# Altium PCB SHIELD_TRF7960A.PcbDoc
Units mil, origin at the board's own origin, x right, y up, seen from the top; angles counter-clockwise.
Board outline 3895 x 2300 mil, 2 copper layers (Top Layer, Bottom Layer); 71 components, 58 nets, 201 pads, 46 vias.
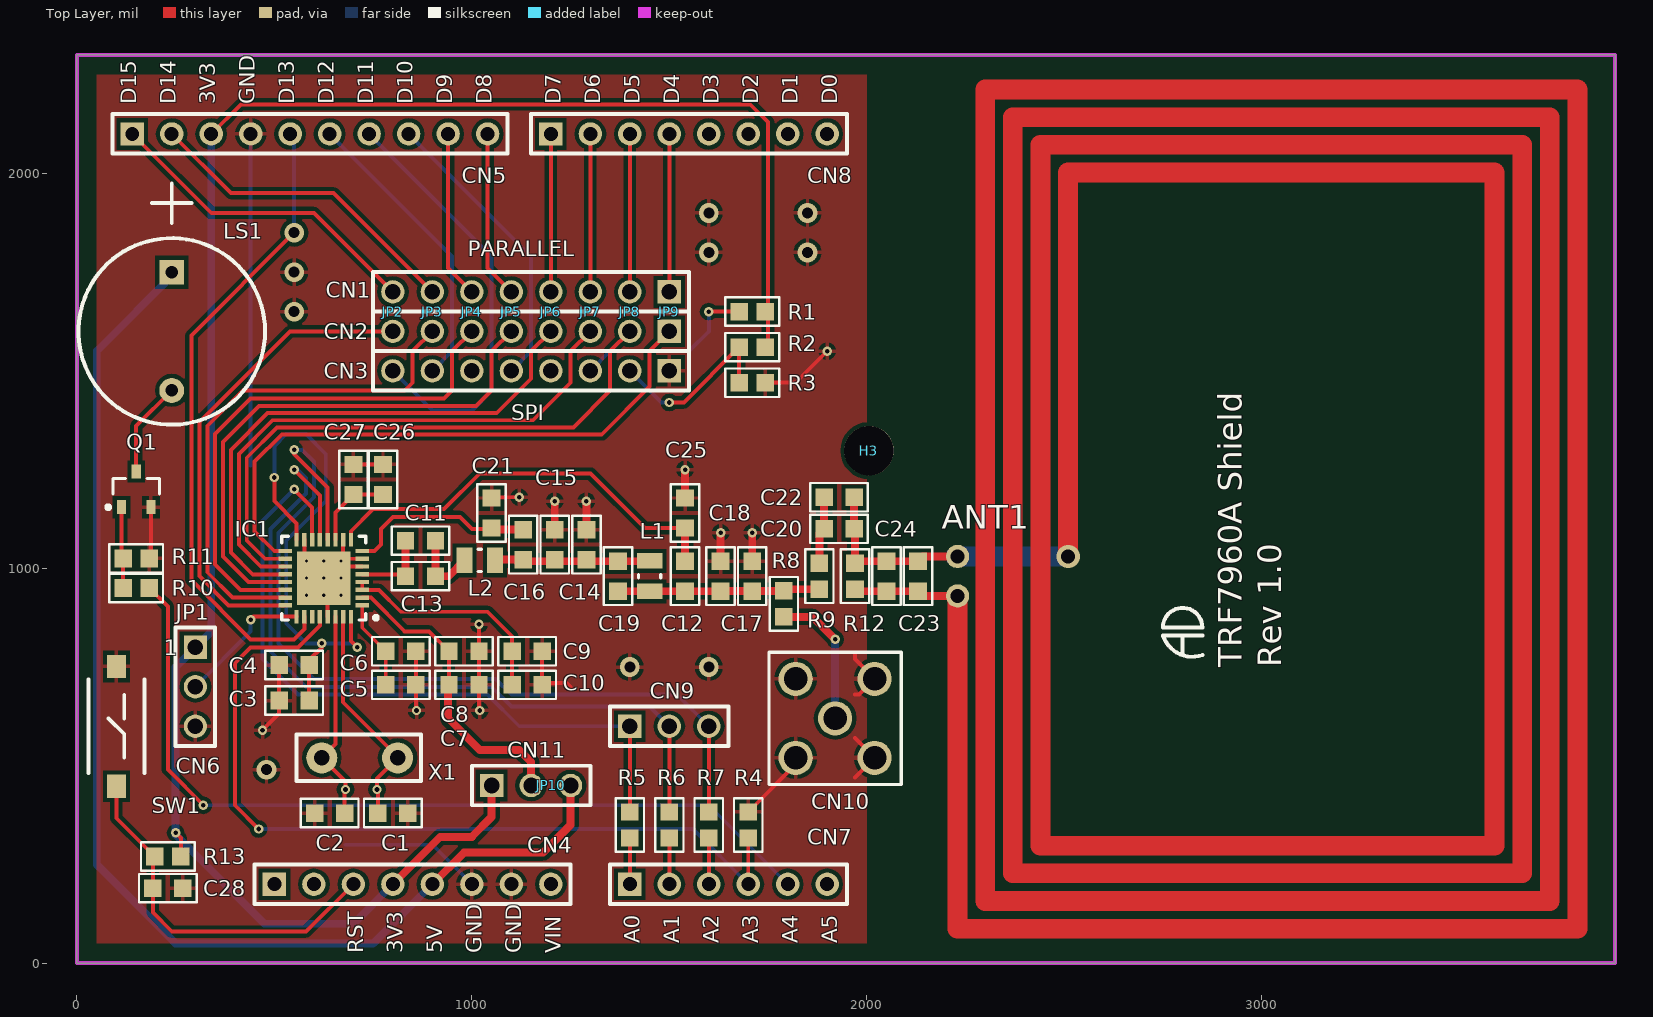
[diagram p0: Top Layer view]
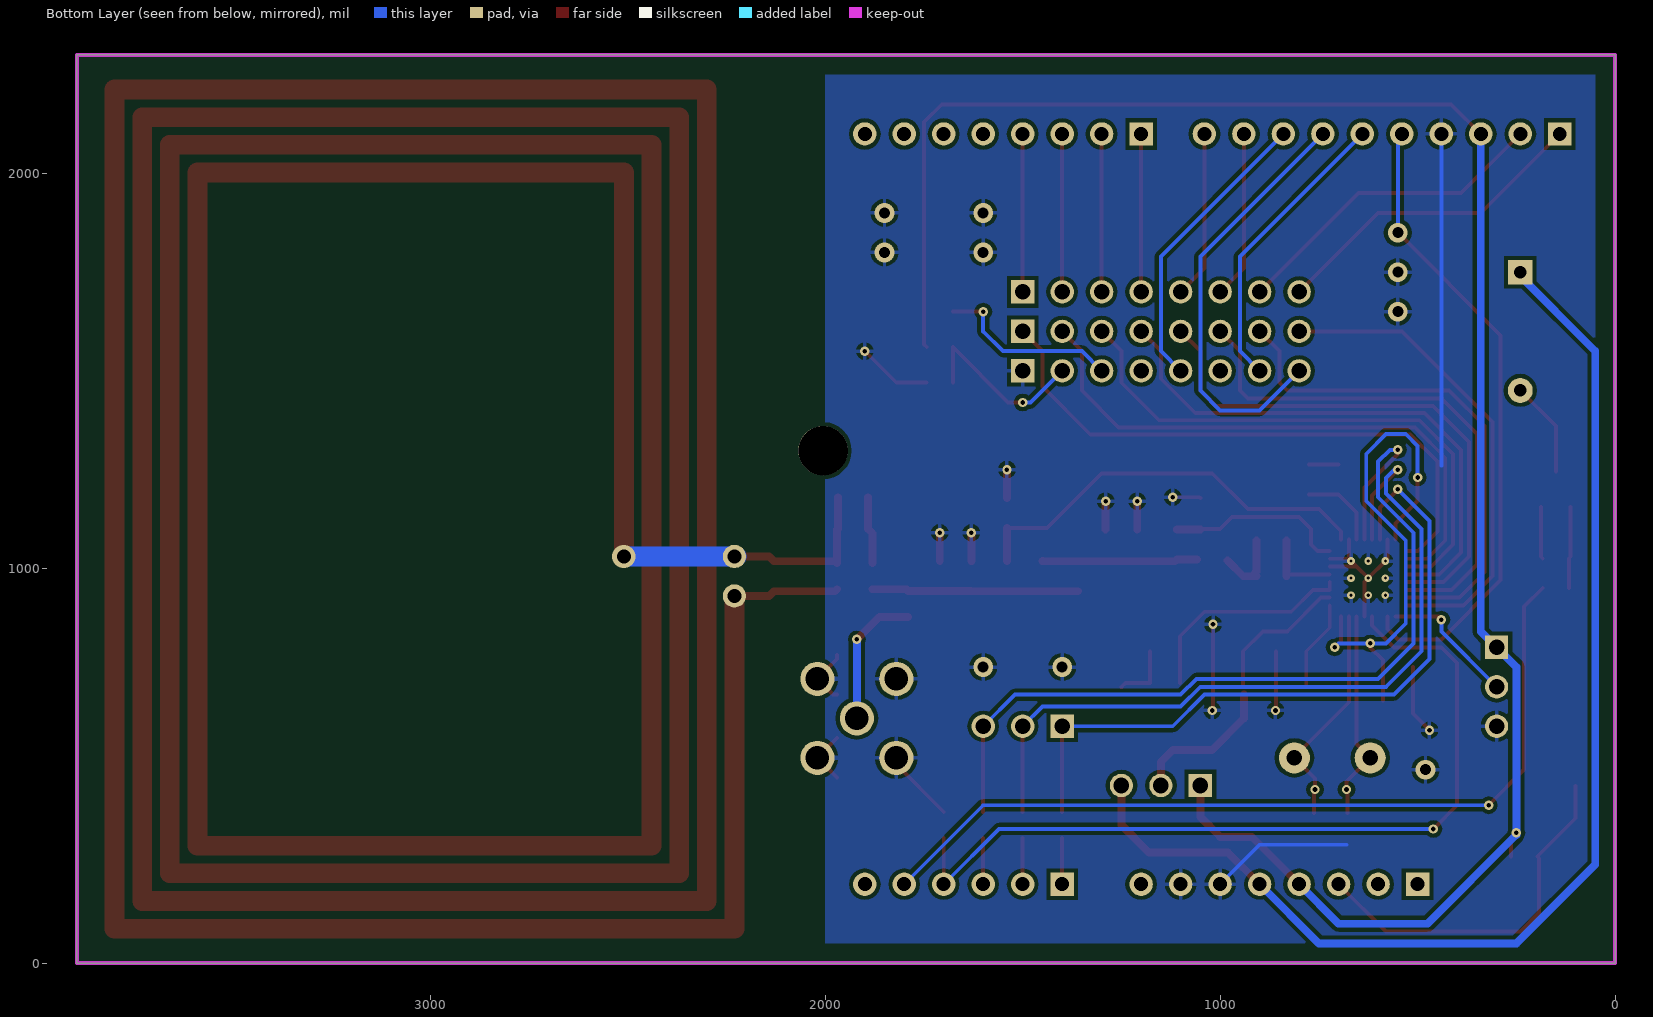
[diagram p1: Bottom Layer view, seen from below]

## Layer stack, top to bottom
Top Solder: solder mask 0.4, Solder Resist, Dk 3.5
Top Layer: signal copper 1.4
Dielectric 1: dielectric 12.6, FR-4, Dk 4.8
Bottom Layer: signal copper 1.4
Bottom Solder: solder mask 0.4, Solder Resist, Dk 3.5

## Board outline
0,0 0,2300 3895,2300 3895,0

## Design rules (kind name [scope] priority, off if disabled: settings)
Clearance [All] p1: gap=6 except(10: Arc-Fill Arc-Poly Track-Fill Track-Poly SMDPad-Fill SMDPad-Poly THPad-Fill THPad-Poly Via-Fill Via-Poly Fill-Fill Fill-Poly Poly-Poly)
HoleSize [All] p1: absolutevalues=TRUE maxlimit=500 minlimit=1 maxpercent=80.000 minpercent=20.000
MinimumSolderMaskSliver [All] p1: minsoldermaskwidth=6
PolygonConnect [All] p1: connectstyle=Relief reliefconductorwidth=10 reliefentries=4 polygonreliefangle="90 Angle" airgapwidth=10
RoutingVias [All] p1: holewidth=11.81 width=23.62 viastyle="Through Hole" minholewidth=11.81 minwidth=23.62 maxholewidth=11.81 maxwidth=23.62
SilkToSilkClearance [All] p1: silktosilkclearance=6
SilkToSolderMaskClearance [IsPad] p1: minsilkscreentomaskgap=6 clearancetoexposedcopper=TRUE
SolderMaskExpansion [All] p1: expansion=4
Width [All] p1: maxlimit=50 minlimit=10 preferedwidth=20 minimp=50.000000 maximp=50.000000 favimp=50.000000
26 further rules are at their usual default settings.

## Components (designator, comment, footprint, x,y, rotation, side; value= is the part's Value field where it differs from the comment)
ANT1 "ANTENNA_LOOP" ANTENNA_LOOP 2230,930 r90 top
C1 "CAP_NP" CAPC1608X90N_EIA0603 800,380 r0 top
C2 "CAP_NP" CAPC1608X90N_EIA0603 640,380 r180 top
C3 "CAP_NP" CAPC1608X90N_EIA0603 550,665 r0 top
C4 "CAP_NP" CAPC1608X90N_EIA0603 550,755 r0 top
C5 "CAP_NP" CAPC1608X90N_EIA0603 820,705 r180 top
C6 "CAP_NP" CAPC1608X90N_EIA0603 820,790 r180 top
C7 "CAP_NP" CAPC1608X90N_EIA0603 980,705 r180 top
C8 "CAP_NP" CAPC1608X90N_EIA0603 980,790 r180 top
C9 "CAP_NP" CAPC1608X90N_EIA0603 1140,705 r180 top
C10 "CAP_NP" CAPC1608X90N_EIA0603 1140,790 r180 top
C11 "CAP_NP" CAPC1608X90N_EIA0603 870,1070 r0 top
C12 "CAP_NP" CAPC1608X90N_EIA0603 1540,980 r270 top
C13 "CAP_NP" CAPC1608X90N_EIA0603 870,980 r0 top
C14 "CAP_NP" CAPC1608X90N_EIA0603 1290,1060 r270 top
C15 "CAP_NP" CAPC1608X90N_EIA0603 1210,1060 r270 top
C16 "CAP_NP" CAPC1608X90N_EIA0603 1130,1060 r270 top
C17 "CAP_NP" CAPC1608X90N_EIA0603 1710,980 r270 top
C18 "CAP_NP" CAPC1608X90N_EIA0603 1630,980 r270 top
C19 "CAP_NP" CAPC1608X90N_EIA0603 1370,980 r270 top
C20 "CAP_NP" CAPC1608X90N_EIA0603 1930,1100 r0 top
C21 "CAP_NP" CAPC1608X90N_EIA0603 1050,1140 r270 top
C22 "CAP_NP" CAPC1608X90N_EIA0603 1930,1180 r0 top
C23 "CAP_NP" CAPC1608X90N_EIA0603 2130,980 r270 top
C24 "CAP_NP" CAPC1608X90N_EIA0603 2050,980 r270 top
C25 "CAP_NP" CAPC1608X90N_EIA0603 1540,1140 r270 top
C26 "CAP_NP" CAPC1608X90N_EIA0603 775,1225 r270 top
C27 "CAP_NP" CAPC1608X90N_EIA0603 700,1225 r270 top
C28 "CAP_NP" CAPC1608X90N_EIA0603 230,190 r180 top
CN1 "HDRV_1X8" HDRV8W64P254_1X8_2032X254X600P 1500,1700 r180 top
CN2 "HDRV_1X8" HDRV8W64P254_1X8_2032X254X600P 1500,1600 r180 top
CN3 "HDRV_1X8" HDRV8W64P254_1X8_2032X254X600P 1500,1500 r180 top
CN4 "HDR_1X8" HDRFV8W70P254_1X8_2032X254X1118P 500,200 r0 top locked
CN5 "HDR_1X10" HDRFV10W70P254_1X10_2540X254X1118P 140,2100 r0 top locked
CN6 "HDR_1X3" HDRV3W64P254_1X3_762X254X600P 300,800 r270 top
CN7 "HDR_1X6" HDRFV6W70P254_1X6_1524X254X1118P 1400,200 r0 top locked
CN8 "HDR_1X8" HDRFV8W70P254_1X8_2032X254X1118P 1200,2100 r0 top locked
CN9 "HDR_1X3" HDRV3W64P254_1X3_762X254X600P 1400,600 r0 top
CN10 "SMA" EMERSON_142-0701-201 1920,620 r0 top
CN11 "HDR_1X3" HDRV3W64P254_1X3_762X254X600P 1050,450 r0 top
H3 "HOLES" HOLE_125MIL 2005.51,1298.03 r0 top
IC1 "TRF7960A" QFN50P350X500X90_HS-33N 625,975 r180 top
JP1 "JUMPER" JUMPER254P 300,750 r90 top
JP2 "JUMPER" JUMPER254P 800,1650 r90 top
JP3 "JUMPER" JUMPER254P 900,1650 r90 top
JP4 "JUMPER" JUMPER254P 1000,1650 r90 top
JP5 "JUMPER" JUMPER254P 1100,1650 r90 top
JP6 "JUMPER" JUMPER254P 1200,1650 r90 top
JP7 "JUMPER" JUMPER254P 1300,1650 r90 top
JP8 "JUMPER" JUMPER254P 1400,1650 r90 top
JP9 "JUMPER" JUMPER254P 1500,1650 r90 top
JP10 "JUMPER" JUMPER254P 1200,450 r180 top
L1 "INDUCTOR" INDC2115X13N_EIA0805 1450,980 r90 top
L2 "INDUCTOR" INDC2115X13N_EIA0805 1020,1020 r180 top
LS1 "BUZZER" BUZZER_12MM 240,1600 r270 top
Q1 "BC817" SOT95P230X110-3N_SOT-23 150,1200 r90 top
R1 "RES" RESC1608X50N_EIA0603 1710,1650 r180 top
R2 "RES" RESC1608X50N_EIA0603 1710,1560 r180 top
R3 "RES" RESC1608X50N_EIA0603 1710,1470 r0 top
R4 "RES" RESC1608X50N_EIA0603 1700,350 r270 top
R5 "RES" RESC1608X50N_EIA0603 1400,350 r90 top
R6 "RES" RESC1608X50N_EIA0603 1500,350 r90 top
R7 "RES" RESC1608X50N_EIA0603 1600,350 r90 top
R8 "RES" RESC1608X50N_EIA0603 1790,910 r270 top (schematic designator R?)
R9 "RES" RESC1608X50N_EIA0603 1880,980 r90 top (schematic designator R?)
R10 "RES" RESC1608X50N_EIA0603 150,950 r180 top
R11 "RES" RESC1608X50N_EIA0603 150,1025 r0 top
R12 "RES" RESC1608X50N_EIA0603 1970,980 r270 top
R13 "RES" RESC1608X50N_EIA0603 230,270 r180 top
SW1 "SWITCH_TACTILE_2PIN" C&K_RS-282G05A3-SM_RT 100,600 r90 top
X1 "CRYSTAL" HC-49/US 812.13,520 r180 top

## Footprints (in the part's own frame and the unit in brackets; to place one, negate y for a bottom-side part, rotate by r counter-clockwise, add the part's x,y. Pads: shape width x height; smd on the part's side, far side on the other; paste and mask are expansions set on the pad)
ANTENNA_LOOP [mm]
  round 1.5 hole 0.9: 1(0,0) 2(2.54,0)
BUZZER_12MM [mm]
  rect 1.6x1.6 hole 0.8: 1(-3.8,0)
  round 1.6 hole 0.8: 2(3.8,0)
  silkscreen extent -9.53,-6 6,6, body extent -6,-6 6,6, height 9.01
C&K_RS-282G05A3-SM_RT [mm]
  rect 1.5x1.2 smd: 1(-3.85,0) 2(3.85,0)
  silkscreen extent -3,-1.8 3,1.8, body extent -4,-1.75 4,1.75, height 5
CAPC1608X90N_EIA0603 [mil]
  rect 44x45 smd: 1(-38,0) 2(38,0)
  silkscreen extent -73,-36 73,36, body extent -39,-15 39,16, height 31
EMERSON_142-0701-201 [mm]
  round 2.2 hole 1.5 mask+0.075: 1(0,0) 2(-2.54,2.54) 3(2.54,2.54) 4(2.54,-2.54) 5(-2.54,-2.54)
  silkscreen extent -4.25,-4.25 4.25,4.25, body extent -3.18,-3.15 3.13,3.16, height 9.85
HC-49/US [mm]
  round 2 hole 1: 1(0,0) 2(4.88,0)
  silkscreen extent -1.5,-1.5 6.5,1.5, body extent -2.99,-2.24 7.99,2.25, height 3.6
HDRFV6W70P254_1X6_1524X254X1118P [mm]
  rect 1.5x1.5 hole 0.9: 1(0,0)
  round 1.5 hole 0.9: 2(2.54,0) 3(5.08,0) 4(7.62,0) 5(10.16,0) 6(12.7,0)
  silkscreen extent -1.27,-1.27 13.97,1.27, body extent -1.27,-1.27 13.97,1.27, height 6.02
HDRFV8W70P254_1X8_2032X254X1118P [mm]
  rect 1.5x1.5 hole 0.9: 1(0,0)
  round 1.5 hole 0.9: 2(2.54,0) 3(5.08,0) 4(7.62,0) 5(10.16,0) 6(12.7,0) 7(15.24,0) 8(17.78,0)
  silkscreen extent -1.27,-1.27 19.05,1.27, body extent -1.27,-1.27 19.05,1.27, height 6.02
HDRFV10W70P254_1X10_2540X254X1118P [mm]
  rect 1.5x1.5 hole 0.9: 1(0,0)
  round 1.5 hole 0.9: 2(2.54,0) 3(5.08,0) 4(7.62,0) 5(10.16,0) 6(12.7,0) 7(15.24,0) 8(17.78,0) 9(20.32,0) 10(22.86,0)
  silkscreen extent -1.27,-1.27 24.13,1.27, body extent -1.27,-1.27 24.13,1.27, height 6.02
HDRV3W64P254_1X3_762X254X600P [mm]
  rect 1.5x1.5 hole 1: 1(0,0)
  round 1.5 hole 1: 2(2.54,0) 3(5.08,0)
  silkscreen extent -1.27,-1.27 6.35,1.27, body extent -1.24,-1.27 6.38,1.27, height 5.94
HDRV8W64P254_1X8_2032X254X600P [mm]
  rect 1.5x1.5 hole 1: 1(0,0)
  round 1.5 hole 1: 2(2.54,0) 3(5.08,0) 4(7.62,0) 5(10.16,0) 6(12.7,0) 7(15.24,0) 8(17.78,0)
  silkscreen extent -1.27,-1.27 19.05,1.27, body extent -1.27,-1.27 19.05,1.27, height 5.94
HOLE_125MIL [mil]
  round 125 hole 125: 1(0,0)
INDC2115X13N_EIA0805 [mm] "Chip Inductor, 2-Leads, Body 2.10x1.50mm, IPC Medium Density"
  rect 1x1.64 smd: 1(-0.98,0) 2(0.98,0)
  silkscreen extent -0.1,-0.72 0.1,0.72, body extent -1,-0.66 1,0.64, height 1.21
JUMPER254P [mil]
  body extent -68,-48 68,48, height 277
QFN50P350X500X90_HS-33N [mm] "QFN, 32-Leads, Body 3.50x5.00mm, Pitch 0.50mm, Thermal Pad 3.45x3.45mm, IPC Medium Density"
  rect 0.85x0.28 smd: 1(-2.475,1.75) 2(-2.475,1.25) 3(-2.475,0.75) 4(-2.475,0.25) 5(-2.475,-0.25) 6(-2.475,-0.75) 7(-2.475,-1.25) 8(-2.475,-1.75) 17(2.475,-1.75) 18(2.475,-1.25) 19(2.475,-0.75) 20(2.475,-0.25) 21(2.475,0.25) 22(2.475,0.75) 23(2.475,1.25) 24(2.475,1.75)
  rect 0.28x0.85 smd: 9(-1.75,-2.475) 10(-1.25,-2.475) 11(-0.75,-2.475) 12(-0.25,-2.475) 13(0.25,-2.475) 14(0.75,-2.475) 15(1.25,-2.475) 16(1.75,-2.475) 25(1.75,2.475) 26(1.25,2.475) 27(0.75,2.475) 28(0.25,2.475) 29(-0.25,2.475) 30(-0.75,2.475) 31(-1.25,2.475) 32(-1.75,2.475)
  rect 3.45x3.45 smd: 33(0,0)
  silkscreen extent -3.47,-2.7 2.7,2.7, body extent -2.52,-2.51 2.5,2.51, height 0.8
RESC1608X50N_EIA0603 [mil]
  rect 44x45 smd: 1(-33,0) 2(33,0)
  silkscreen extent -68,-36 68,36, body extent -39,-15 39,16, height 31
SOT95P230X110-3N_SOT-23 [mm] "SOT23, 3-Leads, Body 2.90x2.30mm, Pitch 0.95mm, IPC Medium Density"
  rect 0.9x0.6 smd: 1(-1.15,0.95) 2(-1.15,-0.95) 3(1.15,0)
  silkscreen extent -1.27,-1.5 0.7,1.92, body extent -1.17,-1.46 1.17,1.46, height 1

## Part data
ANT1: library part SMSC00004, "ANTENNA LOOP"
C1 C2: library part SCAP00200035, "CAP CER 12PF 50V NP0 0603"
C3 C5 C7 C9 C26: library part SCAP00200098, "CAP CER 2.2UF 6.3V X5R 0603"
C4 C6 C8 C10 C27: library part SCAP00200083, "CAP CER 10000PF 50V X7R 0603"
C11 C13: library part SCAP00200075, "CAP CER 1500PF 50V X7R 0603"
C12: library part SCAP00200065, "CAP CER 220PF 50V NP0 0603"
C14 C24: library part SCAP00200000
C15 C25: library part SCAP00200071, "CAP CER 680PF 50V NP0 0603"
C16 C21: library part SCAP00200074, "CAP CER 1200PF 50V X7R 0603"
C17: library part SCAP00200043, "CAP CER 27PF 50V NP0 0603"
C18: library part SCAP00200057, "CAP CER 100PF 50V NP0 0603"
C19 C22: library part SCAP00200033, "CAP CER 10PF 50V NP0 0603"
C20: library part SCAP00200049, "CAP CER 47PF 50V NP0 0603"
C23: library part SCAP00200051, "CAP CER 56PF 50V NP0 0603"
C28: library part SCAP00200091, "CAP CER 0.1UF 16V X7R 0603"
CN1 CN2 CN3: library part SCON00132, "CONN HEADER 8POS .100 VERT TIN"
CN4 CN8: library part SCON00125, "CONN ARDUINO HEADER .0100\" 8POS"
CN5: library part SCON00126, "CONN ARDUINO HEADER .0100\" 10POS"
CN6 CN9 CN11: library part SCON00131, "CONN HEADER MALE 3PS .1\" DL TIN"
CN7: library part SCON00124, "CONN ARDUINO HEADER .0100\" 6POS"
CN10: library part SCON00009, "CONN SMA JACK STR 50 OHM PCB"
H3: library part SMSC00005, "Holes"
IC1: library part SIC00130, "IC RFID AFE 13.56MHZ 32QFN"
JP1 JP2 JP3 JP4 JP5 JP6 JP7 JP8 JP9 JP10: library part SCON00007, "SHUNT JUMPER .1\" BLACK GOLD"
L1: library part SIND00005, "FIXED IND 330NH 300MA 1.28 OHM"
L2: library part SIND00004, "FIXED IND 150NH 400MA 670 MOHM"
LS1: library part SAUD00001, "AUDIO MAGNETIC INDICATOR 4-7V TH"
Q1: library part STRANS00034, "TRANS NPN 45V 0.5A SOT23"
R1 R2 R4 R10 R13: library part SRES02000098, "RES SMD 10K OHM 1% 1/10W 0603"
R3 R8 R9: library part SRES02030001, "RES SMD 0.0 OHM JUMPER 1/8W 0603"
R5 R6 R7 R12: library part SRES02000074, "RES SMD 1K OHM 1% 1/10W 0603"
R11: library part SRES02000114, "RES SMD 47K OHM 1% 1/10W 0603"
SW1: library part SSWI00022, "SWITCH TACTILE SPST-NO 0.05A 12V"
X1: library part SCRY00014, "CRYSTAL 13.5600MHZ 12PF T/H"

## Via types
v1: diameter 23.62, hole 11.81, Top Layer to Bottom Layer, 26 vias
v2: diameter 50, hole 28, Top Layer to Bottom Layer, 10 vias
v3: diameter 19.68, hole 7.87, Top Layer to Bottom Layer, 9 vias
v4: diameter 59.06, hole 35.43, Top Layer to Bottom Layer, 1 vias

## Nets (pads, with @x,y where several pads share a name; then routed paths per layer and width w, separated by ;. In a path a pad name is that pad's centre, name@x,y a point inside that pad or via, vN(x,y) a via of type N, cw(c..) or ccw(c..) an arc to the next point about the centre after c; other vN are vias at no path point)
3V3: CN4.4 CN5.3 CN6.1 CN11.1 R1.1 R2.1 R13.1 | length 4995.3
  Top Layer w10: v1(250,330) 263,317 R13.1 ; CN5.3 415,2175 1705,2175 1750,2130 1750,1567 R2.1
  Top Layer w20: CN4.4 920,320 1000,320 1050,370 CN11.1
  Bottom Layer w20: CN5.3 340,840 250,750 v1(250,330) 250,325 475,100 700,100 CN4.4
5V: CN4.5 CN11.3 LS1.1 | length 3089.7
  Top Layer w20: CN4.5 980,280 1180,280 1250,350 CN11.3
  Bottom Layer w20: LS1.1@249.8,1749.8 50,1550 50,250 250,50 750,50 CN4.5
A0: CN7.1 R5.1 | length 117
  Top Layer w10: CN7.1 R5.1
A1: CN7.2 R6.1 | length 117
  Top Layer w10: CN7.2 R6.1
A2: CN7.3 R7.1 | length 117
  Top Layer w10: CN7.3 R7.1
A3: CN7.4 IC1.28 R4.2 | length 2136.8
  Top Layer w10: v1(460,340) 400,400 400,760 440,800 560,800 615.16,855.16 IC1.28 ; CN7.4 R4.2
  Bottom Layer w10: v1(460,340) 1560,340 CN7.4
A4: CN7.5 R10.1 | length 2169.6
  Top Layer w10: R10.1 230,903 230,490 v1(320,400)
  Bottom Layer w10: v1(320,400) 1600,400 CN7.5
A5: CN7.6
ANT-1: ANT1.1 ANT1.2 C20.2 C22.2 C23.1 C23.2 C24.1 C24.2 R12.1 R12.2 | length 26806.9
  Top Layer w20: C22.2 C20.2 1970,1098 R12.1 1975,1018 C24.1 C23.1 2142,1030 ANT1.2 ; R12.2 1975,942 C24.2 C23.2 2142,930 ANT1.1
  Top Layer w50: ANT1.1 2230,87.5 3800,87.5 3800,2212.5 2300,2212.5 2300,157.5 3730,157.5 3730,2142.5 2370,2142.5 2370,227.5 3660,227.5 3660,2072.5 2440,2072.5 2440,297.5 3590,297.5 3590,2002.5 2510,2002.5 v4(2510,1030)
  Bottom Layer w50: ANT1.2@2225,1030 ANT1.2 v4(2510,1030)
D0: CN8.8
D1: CN8.7
D2: CN8.6
D3: CN8.5
D4: CN1.1 CN8.4 | length 400
  Top Layer w10: CN1.1 CN8.4
D5: CN1.2 CN8.3 | length 400
  Top Layer w10: CN1.2 CN8.3
D6: CN1.3 CN8.2 | length 400
  Top Layer w10: CN1.3 CN8.2
D7: CN1.4 CN8.1 | length 400
  Top Layer w10: CN1.4 CN8.1
D8: CN1.5 CN5.10 | length 424.9
  Top Layer w10: CN5.10 1040,1760 CN1.5
D9: CN1.6 CN5.9 | length 424.9
  Top Layer w10: CN5.9 940,1760 CN1.6
D10: CN3.5 CN5.8 | length 749.1
  Bottom Layer w10: CN5.8 1150,1790 1150,1550 CN3.5
D11: CN3.8 CN5.7 | length 1090.5
  Bottom Layer w10: CN5.7 1050,1790 1050,1450 1000,1400 900,1400 CN3.8
D12: CN3.7 CN5.6 | length 749.1
  Bottom Layer w10: CN5.6 950,1790 950,1550 CN3.7
D13: CN5.5 IC1.26 | length 1618.1
  Top Layer w10: v2(550,1850) 290,1590 290,970 440,820 550,820 575.79,845.79 IC1.26
  Bottom Layer w10: v2(550,1850) CN5.5@550,2090
D14: CN1.7 CN5.2 | length 825.7
  Top Layer w10: CN5.2 390,1950 650,1950 CN1.7
D15: CN1.8 CN5.1 | length 825.7
  Top Layer w10: CN5.1 340,1900 600,1900 CN1.8
GND: C1.2 C2.2 C3.1 C4.1 C5.1 C6.1 C7.1 C8.1 C9.1 C10.1 C14.1 C15.1 C17.1 C18.1 C21.1 C25.1 C26.1 C27.1 C28.1 CN3.1 CN4.6 CN4.7 CN5.4 CN6.3 CN10.2 CN10.3 CN10.4 CN10.5 IC1.6 IC1.7 IC1.10 IC1.15 IC1.29 IC1.33 Q1.2 R3.2 R4.1 R11.2 SW1.2 | length 3661.1
  Top Layer w10: R11.2 187.4,1029.4 Q1.2 ; v1(470,590) 512,632 C4.1@512,750 ; IC1.15 575.79,1024.21 v3(581.69,1018.31) v3(625,975) ; IC1.29 634.84,965.16 v3(625,975) ; IC1.10 IC1.33@674.21,1024.21 ; C27.1 C26.1 ; IC1.6 IC1.33@654.53,1004.53 ; IC1.7 IC1.33@674.21,1024.21 ; C6.1 858,642 v1(860,640) ; v1(1018,858.24) C8.1 C7.1 1018,642 v1(1020,640) ; C21.1 1052,1180 v1(1120,1180) ; C10.1 1178,710 1240,710 1250,700 ; R4.1 1820,503 CN10.5 ; R3.2 1820,1470 v1(1900,1550) ; 1970,470 CN10.4 1970,570 ; 1970,680 1980,680 CN10.3 1970,770 1970,780 ; v3(625,975) IC1.33@654.53,1004.53 ; IC1.33@654.53,1004.53 IC1.33@674.21,1024.21
  Top Layer w20: C15.1 v1(1210,1170) ; C14.1 v1(1290,1170) ; C25.1 v1(1540,1250) ; C18.1 v1(1630,1090) ; C17.1 v1(1710,1090)
  Bottom Layer w10: 440,1260 CN5.4 ; 680,300 900,300 CN4.6
  other v2: 480,490 1400,750 1600,750 550,1650 550,1750 1600,1800 1850,1800 1600,1900 1850,1900
  other v3: 581.69,931.69 625,931.69 668.31,931.69 581.69,975 668.31,975 625,1018.31 668.31,1018.31
NetC1_1: C1.1 IC1.31 X1.1 | length 577.1
  Top Layer w10: IC1.31 674.21,660.79 812.13,522.87 X1.1 760,467.87 v1(760,440) 762,438 C1.1
NetC2_1: C2.1 IC1.30 X1.2 | length 537.9
  Top Layer w10: IC1.30 655,877.09 655,555 X1.2 680,460 v1(680,440) 678,438 C2.1
NetC5_2: C5.2 C6.2 IC1.1 | length 225.8
  Top Layer w10: IC1.1 722.44,849.56 C6.2 C5.2
NetC9_2: C9.2 C10.2 IC1.3 IC1.4 | length 565.9
  Top Layer w10: IC1.4 IC1.3 764.53,945.47 820,890 1040,890 1102,828 C10.2 C9.2@1102,710
NetC11_1: C11.1 C13.1 IC1.5 | length 201.6
  Top Layer w10: IC1.5 827.16,984.84 C13.1
  Top Layer w20: C13.1 C11.1
NetC11_2: C11.2 C13.2 L2.2 | length 185
  Top Layer w20: C13.2 C13.2@920,980 ; C11.2 908,992 C13.2@920,980 ; L2.2 941.42,980 C13.2@920,980
NetC12_1: C12.1 C25.2 IC1.9 | length 1069.2
  Top Layer w10: IC1.9 693.9,1093.9 750,1150 930,1150 1020,1240 1300,1240 1438,1102 C25.2
  Top Layer w20: C12.1 C25.2
NetC12_2: C12.2 C17.2 C18.2 C19.2 L1.1 R8.1 R9.1 | length 522.1
  Top Layer w20: C19.2@1360,942 C12.2 C18.2 1631,943 R8.1 1794,947 R9.1
NetC14_2: C14.2 C15.2 C16.2 C19.1 L1.2 L2.1 | length 393.3
  Top Layer w20: L2.1@1058.58,1022 1110,1022 1114,1018 1360,1018 1449.42,1018 L1.2
NetC16_1: C16.1 C21.2 IC1.8 | length 459.9
  Top Layer w10: IC1.8 753.9,1043.9 770,1060 770,1100 800,1130 970,1130 1000,1100 1048,1100 C21.2
  Top Layer w20: C21.2@1050,1098 C16.1@1110,1098
NetC20_1: C20.1 C22.1 R9.2 | length 172
  Top Layer w20: R9.2 1880,1088 C20.1 C22.1
NetC26_2: C26.2 C27.2 IC1.11 | length 208.4
  Top Layer w10: IC1.11 654.53,1141.53 C27.2 C26.2
NetCN3_2: CN3.2 R2.2 R3.1 | length 458.1
  Top Layer w10: v1(1500,1420) 1537,1420 R2.2 R3.1
  Bottom Layer w10: CN3.2 1480,1420 v1(1500,1420)
NetCN3_3: CN3.3 R1.2 | length 468.4
  Top Layer w10: v1(1600,1650) R1.2
  Bottom Layer w10: CN3.3 1350,1550 1550,1550 1600,1600 v1(1600,1650)
NetCN6_2: CN6.2 IC1.25 | length 347.2
  Top Layer w10: v1(440,870) 447.56,877.56 IC1.25
  Bottom Layer w10: CN6.2 440,840 v1(440,870)
NetCN10_1: CN10.1 R8.2 | length 353.6
  Top Layer w20: R8.2 1863,877 v1(1920,820)
  Bottom Layer w20: CN10.1 v1(1920,820)
NetLS1_2: LS1.2 Q1.3 | length 242.4
  Top Layer w10: Q1.3 150,1360.39 LS1.2
NetQ1_1: Q1.1 R10.2 R11.1 | length 206.5
  Top Layer w10: Q1.1 112.6,1029.4 R11.1 R10.2
RESET: C28.2 CN4.3 R13.2 SW1.1 | length 940.3
  Top Layer w10: SW1.1 100,367 R13.2 192,265 C28.2 192,128 240,80 580,80 CN4.3
TRF7960A_ASK/OOK: CN9.3 IC1.12 R7.2 | length 2216.4
  Top Layer w10: v1(550,1300) 550,1290 634.84,1205.16 IC1.12 ; R7.2 CN9.3
  Bottom Layer w10: v1(550,1300) 570,1300 600,1270 600,1180 510,1090 510,810 600,720 1060,720 1100,680 1520,680 CN9.3
TRF7960A_IO0: CN2.1 IC1.17 | length 1514
  Top Layer w10: IC1.17 499.66,1043.9 450,1093.56 450,1270 519,1339 1329,1339 1450,1460 1450,1550 CN2.1
TRF7960A_IO1: CN2.2 IC1.18 | length 1487.7
  Top Layer w10: IC1.18 475.79,1024.21 430,1070 430,1280 507,1357 1257,1357 1350,1450 1350,1550 CN2.2
TRF7960A_IO2: CN2.3 IC1.19 | length 1435.8
  Top Layer w10: IC1.19 465.47,1004.53 410,1060 410,1290 495,1375 1155,1375 1250,1470 1250,1550 CN2.3
TRF7960A_IO3: CN2.4 IC1.20 | length 1395.7
  Top Layer w10: IC1.20 445.16,984.84 390,1040 390,1300 483,1393 1063,1393 1150,1480 1150,1550 CN2.4
TRF7960A_IO4: CN2.5 IC1.21 | length 1379
  Top Layer w10: IC1.21 434.84,965.16 370,1030 370,1320 461,1411 1011,1411 1050,1450 1050,1550 CN2.5
TRF7960A_IO5: CN2.6 IC1.22 | length 1350.6
  Top Layer w10: IC1.22 414.53,945.47 350,1010 350,1340 440,1430 930,1430 950,1450 950,1550 CN2.6
TRF7960A_IO6: CN2.7 IC1.23 | length 1310.4
  Top Layer w10: IC1.23 394.21,925.79 330,990 330,1360 420,1450 830,1450 850,1470 850,1550 CN2.7
TRF7960A_IO7: CN2.8 IC1.24 | length 1223.4
  Top Layer w10: IC1.24 383.9,906.1 310,980 310,1370 540,1600 CN2.8
TRF7960A_IRQ: CN9.2 IC1.13 R6.2 | length 2024.9
  Top Layer w10: v1(550,1250) 615.16,1184.84 IC1.13 ; R6.2 CN9.2
  Bottom Layer w10: v1(550,1250) 558.37,1250 580,1228.37 580,1190 490,1100 490,790 580,700 1050,700 1100,650 1450,650 CN9.2
TRF7960A_MOD: CN9.1 IC1.14 R5.2 | length 1826.9
  Top Layer w10: v1(550,1200) 595.47,1154.53 IC1.14 ; R5.2 CN9.1
  Bottom Layer w10: v1(550,1200) 470,1120 470,770 560,680 1040,680 1120,600 CN9.1
VDD_X: C3.2 C4.2 IC1.16 IC1.32 | length 1342.7
  Top Layer w10: v1(500,1230) 500,1170 556.1,1113.9 IC1.16 ; C3.2 C4.2 588,768 620,800 v1(620,810) ; IC1.32 693.9,816.1 v1(710,800)
  Bottom Layer w10: v1(500,1230) 500,1310 530,1340 580,1340 630,1290 630,1170 530,1070 530,860 580,810 v1(620,810) 700,810 v1(710,800)
VIN: C7.2 C8.2 CN11.2 IC1.2 | length 736.4
  Top Layer w10: IC1.2 744.21,925.79 830,840 892,840 C8.2 C7.2
  Top Layer w20: 940,680 940,620 1020,540 1120,540 1150,510 CN11.2
pads on no net: CN3.4 CN3.6 CN4.1 CN4.2 CN4.8 H3.1 IC1.27

## Polygon pours and split planes (outlines as drawn)
GND on Top Layer "Bottom Layer-No Net" (solid, remove dead copper, pour order 4): 50,50 2000,50 2000,2250 50,2250 50,50
GND on Bottom Layer "Bottom Layer-No Net" (solid, remove dead copper, pour order 6): 50,50 2000,50 2000,2250 50,2250 50,50

## Keep-outs
Keep-Out Layer:
  the board outline again, w10

## Silkscreen, mask and mechanical layers (free items; w line width, h text height)
Top Overlay:
  lines w10: 2800,780 2800,830 ; 2850,780 cw(c2825,855) 2750,830 2850,830 ; 2750,850 cw(c2800,850) 2850,850 2750,850
  text "D15" at 150,2175 h40 r90
  text "D14" at 250,2175 h40 r90
  text "3V3" at 350,2175 h40 r90
  text "GND" at 450,2175 h40 r90
  text "D13" at 550,2175 h40 r90
  text "D12" at 650,2175 h40 r90
  text "D11" at 750,2175 h40 r90
  text "D10" at 850,2175 h40 r90
  text "D9" at 950,2175 h40 r90
  text "D8" at 1050,2175 h40 r90
  text "D7" at 1225,2175 h40 r90
  text "D6" at 1325,2175 h40 r90
  text "D5" at 1425,2175 h40 r90
  text "D4" at 1525,2175 h40 r90
  text "D3" at 1625,2175 h40 r90
  text "D2" at 1725,2175 h40 r90
  text "D1" at 1825,2175 h40 r90
  text "D0" at 1925,2175 h40 r90
  text "PARALLEL" at 990,1790 h40
  text "SPI" at 1100,1375 h40
  text "TRF7960A Shield" at 2950,750 h60 r90
  text "Rev 1.0" at 3050,750 h60 r90
  text "A0" at 1425,50 h40 r90
  text "A1" at 1525,50 h40 r90
  text "A2" at 1625,50 h40 r90
  text "A3" at 1725,50 h40 r90
  text "A4" at 1825,50 h40 r90
  text "A5" at 1925,50 h40 r90
  text "RST" at 725,25 h40 r90
  text "3V3" at 825,25 h40 r90
  text "5V" at 925,25 h40 r90
  text "GND" at 1025,25 h40 r90
  text "GND" at 1125,25 h40 r90
  text "VIN" at 1225,25 h40 r90

## Text inside footprints (layer, text, board x,y; h text height)
CN6: Top Overlay "1" at 220,780 h39.37
CN10: Mechanical 1 "J1" at 1894.54,597.43 h49.21